# Altium PCB NixieClockv1.1.PcbDoc
Units mm, origin at the board's own origin, x right, y up, seen from the top; angles counter-clockwise.
Board outline 140 x 54 mm, 2 copper layers (Top Layer, Bottom Layer); 61 components, 93 nets, 301 pads, 68 vias.
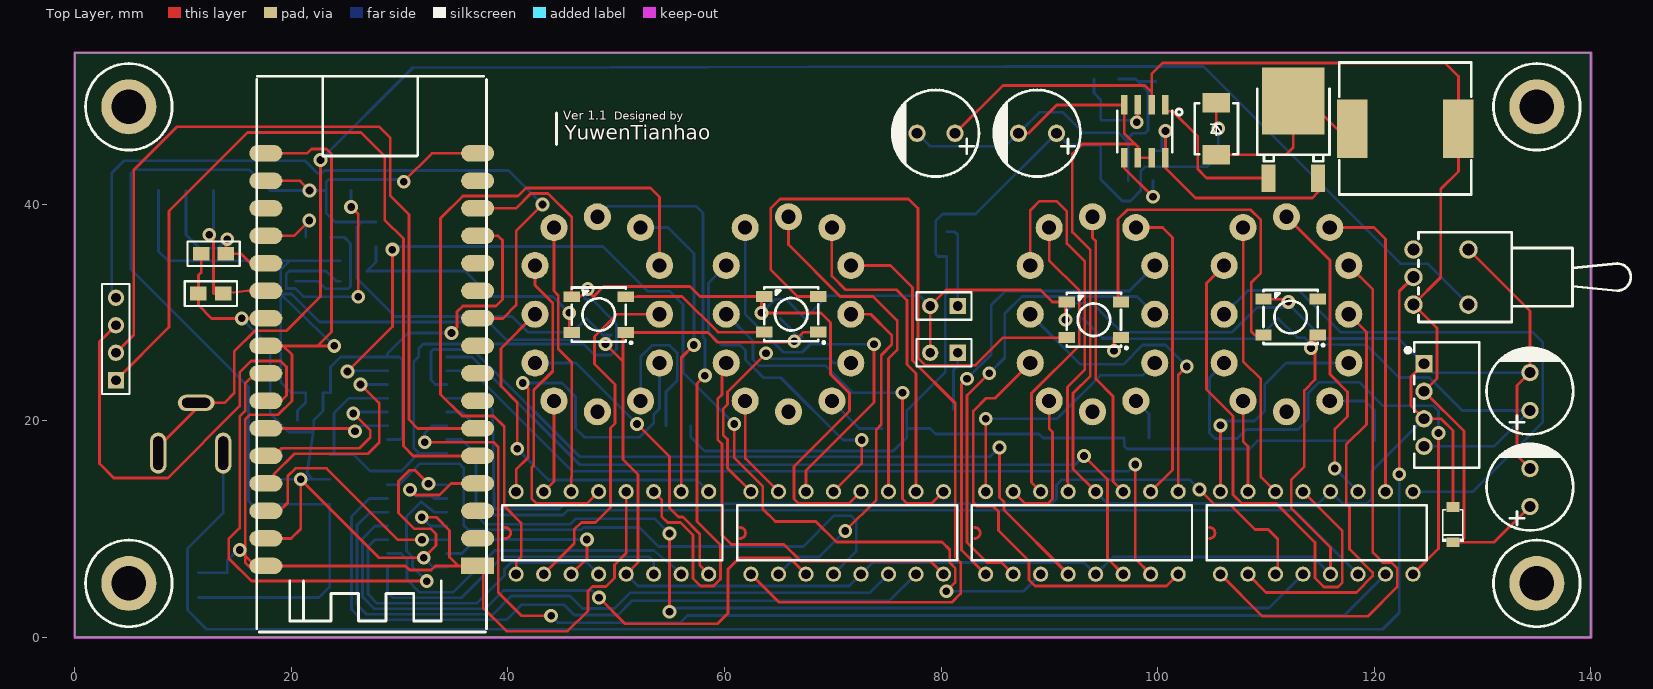
[diagram p0: Top Layer view]
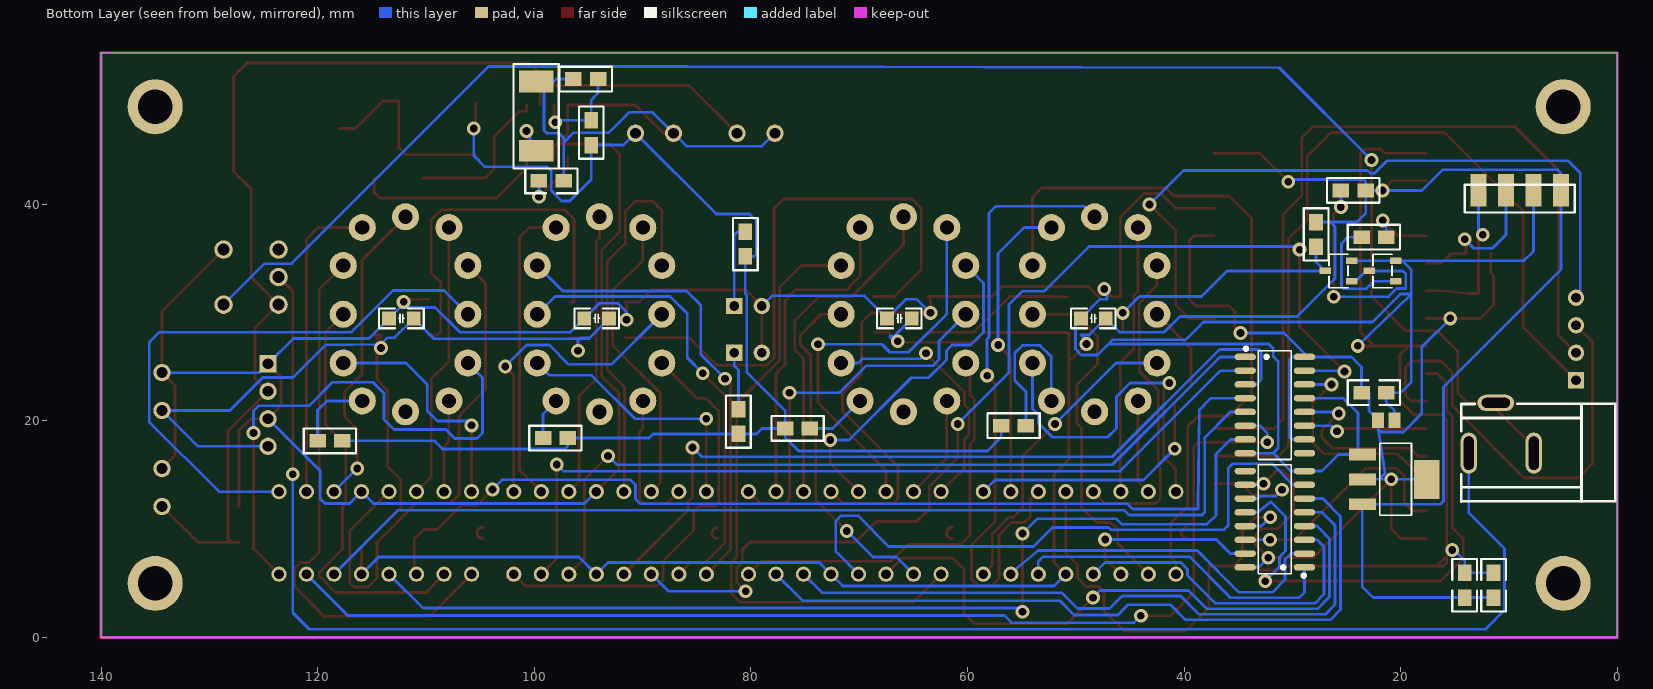
[diagram p1: Bottom Layer view, seen from below]
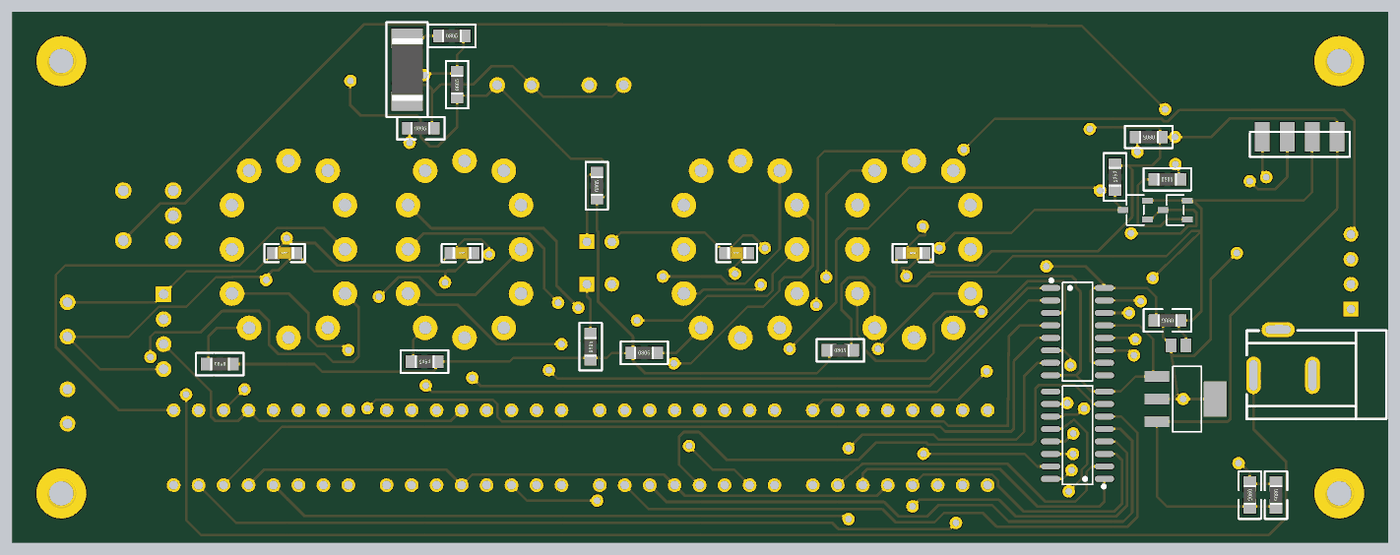
[diagram p2: 3D render of the assembled board from below, using the file's embedded part models]

## Layer stack, top to bottom
Top Solder: solder mask 0.0102, Solder Resist, Dk 3.5
Top Layer: signal copper 0.0356
Dielectric 1: dielectric 0.32, FR-4, Dk 4.8
Bottom Layer: signal copper 0.0356
Bottom Solder: solder mask 0.0102, Solder Resist, Dk 3.5

## Board outline
0,0 0,54 140,54 140,0

## Design rules (kind name [scope] priority, off if disabled: settings)
Clearance [All] p1: gap=0.254 ignorepadtopadclearanceinfootprint=FALSE except(0: Arc-Hole Track-Hole SMDPad-Hole THPad-Hole Via-Hole Fill-Hole Poly-Hole Region-Hole Text-Hole)
PolygonConnect [All] p1: connectstyle=Relief reliefconductorwidth=0.254 reliefentries=4 polygonreliefangle="90 Angle" airgapwidth=0.254
RoutingVias [All] p1: holewidth=0.711 width=1.27 viastyle="Through Hole" minholewidth=0.711 minwidth=1.27 maxholewidth=0.711 maxwidth=1.27
SolderMaskExpansion [All] p1: expansion=0.102 istentingtop=FALSE
Width [All] p1: maxlimit=0.254 minlimit=0.127 preferedwidth=0.254 minimp=50.000000 maximp=50.000000 favimp=50.000000
30 further rules are at their usual default settings.

## Classes and differential pairs
component class NixieClock: *4 *5 *6 *7 *8 C9 C11 C12 C13 LED1 LED2 LED3 LED4 SW1

## Components (designator, comment, footprint, x,y, rotation, side; value= is the part's Value field where it differs from the comment)
*1 "" K155ID1 49.657,9.652 r0 top
*2 "" K155ID1 71.332,9.652 r0 top
*3 "" K155ID1 93.006,9.652 r0 top
*4 "" K155ID1 114.681,9.652 r0 top
*5 "" IN12 48.26,29.845 r0 top
*6 "" IN12 65.913,29.845 r0 top
*7 "" IN12 93.98,29.845 r0 top
*8 "" IN12 111.887,29.845 r0 top
C1 "" C0805 21.336,20.066 r0 bottom
C2 "" 0805C 21.336,22.606 r0 bottom
C3 "" 0805C 14.097,5.969 r270 bottom
C4 "" 0805C 11.43,5.969 r270 bottom
C5 "" CAP-TH_BD8.0-P3.50-D0.5-FD 134.366,13.843 r90 top
C6 "" CAP-TH_BD8.0-P3.50-D0.5-FD 134.366,22.705 r90 top
C7 "" CAP-TH_BD8.0-P3.50-D0.5-FD 79.536,46.555 r180 top
C8 "" 0805C 99.568,42.164 r180 bottom
C9 "" "C 0805_M" 48.387,29.464 r180 bottom value=104
C10 "" CAP-TH_BD8.0-P3.50-D0.5-FD 88.906,46.555 r180 top
C11 "" "C 0805_M" 66.294,29.464 r180 bottom value=104
C12 "" "C 0805_M" 94.234,29.464 r180 bottom value=104
C13 "" "C 0805_M" 112.268,29.464 r180 bottom value=104
D1 "" SOD-123_L2.7-W1.6-LS3.7-RD 127.254,10.43 r90 top
D2 "" SMB_L4.6-W3.6-LS5.3-R-RD 105.41,46.977 r270 top
DC1 "" DC-IN-TH_DC-005-20A 10.715,19.343 r0 bottom
L1 "" IND-SMD_L12.0-W12.0 122.862,46.99 r0 top
LED1 "" LED-SMD_4P-L5.0-W5.0-BL_TC5050RGB 48.387,29.814 r180 top
LED2 "" LED-SMD_4P-L5.0-W5.0-BL_TC5050RGB 66.167,29.845 r180 top
LED3 "" LED-SMD_4P-L5.0-W5.0-BL_TC5050RGB 94.107,29.337 r180 top
LED4 "" LED-SMD_4P-L5.0-W5.0-BL_TC5050RGB 112.268,29.591 r180 top
P1 "" HDR1X2 81.534,26.289 r180 top
P2 "" HDR1X2 81.534,30.607 r180 top
P4 "" HDR1X4#1 3.81,23.749 r90 top
Q1 "" TO-252-2_L6.5-W6.1-P4.56-LS9.9-BR-CW 112.522,45.974 r270 top
Q2 "" SOT-23-3_L2.9-W1.6-P1.90-LS2.8-BR 25.746,33.843 r180 bottom
Q3 "" SOT-23-3_L2.9-W1.6-P1.90-LS2.8-BR 21.682,33.843 r180 bottom
R1 "" 2512R 99.822,48.133 r90 bottom
R2 "" 0805R 96.393,51.562 r180 bottom
R3 "" 0805R 94.742,45.466 r90 bottom
R4 "" 0805R 27.813,38.354 r270 bottom
R5 "" 0805R 23.241,41.275 r0 bottom
R6 "" 0805R 23.622,36.957 r180 bottom
R7 "" 0805R 11.43,31.75 r0 top
R8 "" 0805R 11.684,35.433 r0 top
R9 "" 0805R 56.896,19.558 r180 bottom
R10 "" 0805R 76.835,19.304 r180 bottom
R11 "" 0805R 96.901,18.415 r0 bottom
R12 "" 0805R 117.729,18.161 r0 bottom
R13 "" 0805R 81.153,18.796 r90 bottom
R14 "" 0805R 80.518,35.179 r90 bottom
SW1 "" SW-TH_ST-0-102-C03-N003-RS 126.148,33.274 r90 top
U1 "" SOT-223-3_L6.5-W3.4-P2.30-LS7.0-BR 20.574,14.605 r0 bottom
U2 "" PWRM-TH_BXXXXS-1W 124.587,21.463 r270 top
U3 "" SOIC-16_L9.9-W3.9-P1.27-LS6.0-BL 31.623,10.922 r90 bottom
U4 "" SOIC-16_L9.9-W3.9-P1.27-LS6.0-BL 31.623,21.463 r270 bottom
U5 "" SO-8_L4.9-W3.9-P1.27-LS6.0-BL 98.806,46.736 r180 top
U6 "" LUATOS-ESP32C3 27.305,51.816 r180 top
U7 "" HDR1X4#2 5.207,40.525 r0 bottom
? "" M3x4_L 135,5 r0 top
? "" M3x4_L 5,5 r0 top
? "" M3x4_L 135,49 r0 top
? "" M3x4_L 5,49 r0 top

## Footprints (in the part's own frame and the unit in brackets; to place one, negate y for a bottom-side part, rotate by r counter-clockwise, add the part's x,y. Pads: shape width x height; smd on the part's side, far side on the other; paste and mask are expansions set on the pad)
0805C [mil] "2.0mmx1.2mm（蒜米工坊）"
  rect 60x50 smd: 1(0,0) 2(90,0)
  silkscreen extent -50,-45 140,45, body extent 5,-25 83,25, height 22
0805R [mil]
  rect 60x50 smd: 1(0,0) 2(90,0)
  silkscreen extent -50,-45 140,45, body extent 5,-25 83,25, height 22
2512R [mm]
  rect 2x3.2 smd: 1(-3.2,0) 2(3.2,0)
  silkscreen extent -4.83,-2.08 4.83,2.11, body extent -3.2,-1.63 3.2,1.57, height 0.7
C0805 [mm] "Chip Capacitor, Body 2.0x1.3mm, IPC High Density"
  rect 1.1x1.4 smd: 1(-0.75,0) 2(0.75,0)
  body extent -1.1,-0.72 1.1,0.72, height 1.4
"C 0805_M" [mil] "无极性贴片电容"
  rect 50x50 smd: 1(-45,0) 2(45,0)
  silkscreen extent -81,-36 81,36, body extent -39,-24 39,24, height 20
CAP-TH_BD8.0-P3.50-D0.5-FD [mm]
  round 1.6 hole 1 paste+0 mask+0.051: 1(-1.75,0) 2(1.75,0)
  silkscreen extent -3.96,-4 4.04,4
DC-IN-TH_DC-005-20A [mm]
  oval 1.5x3.8 hole 0.9 slot 3.1 at 90 deg paste+0 mask+0.051: 1(3.001,2.325) 2(-3,2.325)
  oval 3.4x1.5 hole 0.9 slot 2.6 at 0 deg paste+0 mask+0.051: 3(0.5,-2.324)
  silkscreen extent -10.51,-2.24 3.71,6.78
HDR1X2 [mm] "Connector; Header; 2 Position"
  rect 1.5x1.5 hole 0.9: 1(0,0)
  round 1.5 hole 0.9: 2(2.54,0)
  silkscreen extent -1.27,-1.27 3.81,1.27
HDR1X4#1 [mm] "Connector; Header; 4 Position"
  rect 1.5x1.5 hole 0.9: 1(0,0)
  round 1.5 hole 0.9: 2(2.54,0) 3(5.08,0) 4(7.62,0)
  silkscreen extent -1.27,-1.27 8.89,1.27
HDR1X4#2 [mm] "Connector; Header; 4 Position"
  rect 1.5x3 smd: 1(7.62,-0.75) 2(5.08,-0.75) 3(2.54,-0.75) 4(0,-0.75)
  silkscreen extent -1.27,-1.27 8.89,1.27
IN12 [mm]
  round 2.5 hole 1.3 paste+0 mask+0.051: 1(4,-8) 2(5.75,-4.5) 3(5.75,0) 4(5.75,4.5) 5(4,8) 6(0,9) 7(-4,8) 8(-5.75,4.5) 9(-5.75,0) 10(-5.75,-4.5) 11(-4,-8) 12(0,-9)
IND-SMD_L12.0-W12.0 [mm]
  rect 2.8x5.4 smd paste+0 mask+0.051: 1(4.9,0) 2(-4.9,0)
  silkscreen extent -6.1,-6.1 6.1,6.1
K155ID1 [mil]
  round 55 hole 35.83 paste+0 mask+2: 1(-350,-150) 2(-250,-150) 3(-150,-150) 4(-50,-150) 5(50,-150) 6(150,-150) 7(250,-150) 8(350,-150) 9(350,150) 10(250,150) 11(150,150) 12(50,150) 13(-50,150) 14(-150,150) 15(-250,150) 16(-350,150)
  Top Layer lines w10: -390,-20 ccw(c-390,0) -390,20
  silkscreen extent -400,-100 400,100
LED-SMD_4P-L5.0-W5.0-BL_TC5050RGB [mm]
  rect 1.5x1 smd paste+0 mask+0.051: 1(-2.5,1.65) 2(-2.5,-1.65) 3(2.5,-1.65) 4(2.5,1.65)
  silkscreen extent -3.1,-2.5 2.5,2.7
LUATOS-ESP32C3 [mil]
  rect 120x60 smd paste+0 mask+4: 1(-390,1780)
  oval 120x60 smd paste+0 mask+4: 2(-390,1680) 3(-390,1580) 4(-390,1480) 5(-390,1380) 6(-390,1280) 7(-390,1180) 8(-390,1080) 9(-390,980) 10(-390,880) 11(-390,780) 12(-390,680) 13(-390,580) 14(-390,480) 15(-390,380) 16(-390,280) 17(380,1780) 18(380,1680) 19(380,1580) 20(380,1480) 21(380,1380) 22(380,1280) 23(380,1180) 24(380,1080) 25(380,980) 26(380,880) 27(380,780) 28(380,680) 29(380,580) 30(380,480) 31(380,380) 32(380,280)
  silkscreen extent -422,0 413,2020
M3x4_L [mm] "M3铜柱，长：4mm"
  round 5.08 hole 3.175: 1(0,0)
  silkscreen extent -4,-4 4,4, body extent -2.7,-2.35 2.7,2.35, height 4.05
PWRM-TH_BXXXXS-1W [mm]
  rect 1.6x1.6 hole 1 paste+0 mask+0.051: 1(-3.81,0)
  round 1.6 hole 1 paste+0 mask+0.051: 2(-1.27,0) 3(1.27,0) 4(3.81,0)
  silkscreen extent -5.8,-1.68 5.8,5.1
SMB_L4.6-W3.6-LS5.3-R-RD [mm]
  rect 1.8x2.54 smd paste+0 mask+0.051: 1(2.4,0) 2(-2.4,0)
  silkscreen extent -2.35,-2 2.35,2
SO-8_L4.9-W3.9-P1.27-LS6.0-BL [mm]
  rect 0.6x1.8 smd paste+0 mask+0.05: 1(-1.905,-2.45) 2(-0.635,-2.45) 3(0.635,-2.45) 4(1.905,-2.45) 5(1.905,2.45) 6(0.635,2.45) 7(-0.635,2.45) 8(-1.905,2.45)
  silkscreen extent -3.46,-2.06 2.54,1.91
SOD-123_L2.7-W1.6-LS3.7-RD [mm]
  rect 0.91x1.22 smd paste+0 mask+0.051: 1(-1.635,0) 2(1.635,0)
  silkscreen extent -1.6,-1 1.38,1
SOIC-16_L9.9-W3.9-P1.27-LS6.0-BL [mm]
  oval 0.602x1.971 smd: 1(-4.445,-2.735) 2(-3.175,-2.735) 3(-1.905,-2.735) 4(-0.635,-2.735) 5(0.635,-2.735) 6(1.905,-2.735) 7(3.175,-2.735) 8(4.445,-2.735) 9(4.445,2.736) 10(3.175,2.736) 11(1.905,2.736) 12(0.635,2.736) 13(-0.635,2.736) 14(-1.905,2.736) 15(-3.175,2.736) 16(-4.445,2.736)
  silkscreen extent -5.36,-2.82 5.03,1.52
SOT-23-3_L2.9-W1.6-P1.90-LS2.8-BR [mm]
  rect 1.07x0.6 smd paste+0 mask+0.051: 1(1.235,-0.95) 2(1.235,0.95) 3(-1.235,0)
  silkscreen extent -0.88,-1.54 0.88,1.54
SOT-223-3_L6.5-W3.4-P2.30-LS7.0-BR [mm]
  rect 2.5x1.1 smd paste+0 mask+0.051: 1(2.97,-2.3) 2(2.97,0) 3(2.97,2.3)
  rect 2.34x3.6 smd paste+0 mask+0.051: 4(-2.97,0)
  silkscreen extent -1.57,-3.33 1.37,3.33
SW-TH_ST-0-102-C03-N003-RS [mm]
  round 1.7 hole 1.1 paste+0 mask+0.051: 1(-2.54,2.54) 2(0,2.54) 3(2.54,2.54) 4(2.54,-2.54) 5(-2.54,-2.54)
  silkscreen extent -4.15,-17.53 4.15,2.06
TO-252-2_L6.5-W6.1-P4.56-LS9.9-BR-CW [mm]
  rect 2.54x1.3 smd paste+0 mask+0.051: 1(3.556,-2.28) 3(3.556,2.28)
  rect 6.2x5.8 smd paste+0 mask+0.051: 2(-3.556,0)
  silkscreen extent -4.7,-3.33 2,3.34

## Part data
*1 *2 *3 *4: library part K155ID1
*5 *6 *7 *8: library part IN-12
C1 C2 C3 C4: library part C, "Capacitor"
C5 C6 C10: library part 10uF, BOM_JLCPCB Part Class="Extended Part", BOM_Manufacturer=UNITED(怡德), BOM_Manufacturer Part=LW100M2500814PE4, BOM_Supplier=LCSC, BOM_Supplier Part=C2847238, Contributor=LCSC, nameAlias=Capacitance, spicePre=C, spiceSymbolName=LW100M2500814PE4
C7: library part 100uF, BOM_JLCPCB Part Class="Extended Part", BOM_Manufacturer=UNITED(怡德), BOM_Manufacturer Part=LW100M2500814PE4, BOM_Supplier=LCSC, BOM_Supplier Part=C2847238, Contributor=LCSC, nameAlias=Capacitance, spicePre=C, spiceSymbolName=LW100M2500814PE4
C8: library part 0.1u, Contributor=LCEDA_Lib, nameAlias=Value(F), spicePre=C, spiceSymbolName=C_0603_US
C9 C11 C12 C13: library part Cap, "Capacitor", LatestRevisionDate=17-Jul-2002, LatestRevisionNote="Re-released for DXP Platform.", PackageDescription="Radial Cap, Thru-Hole; 2 Leads; 0.3 in Pin Spacing", PackageReference=RAD-0.3, Published=8-Jun-2000, Publisher="Altium Limited"
D1: library part LMSZ5242BT1G, BOM_JLCPCB Part Class="Extended Part", BOM_Manufacturer=LRC(乐山无线电), BOM_Manufacturer Part=LMSZ5242BT1G, BOM_Supplier=LCSC, BOM_Supplier Part=C124150, Contributor=LCSC, spicePre=D, spiceSymbolName=LMSZ5242BT1G
D2: library part SS2200, BOM_JLCPCB Part Class="Extended Part", BOM_Manufacturer=MDD, BOM_Manufacturer Part=SS2200, BOM_Supplier=LCSC, BOM_Supplier Part=C64997, spicePre=D, spiceSymbolName=SS2200
DC1: library part DC-005-20A_C136744, BOM_JLCPCB Part Class="Extended Part", BOM_Manufacturer=韩国韩荣, BOM_Manufacturer Part=DC-005-20A, BOM_Supplier=LCSC, BOM_Supplier Part=C136744, Contributor=LCSC, spicePre=D, spiceSymbolName=DC-005-20A_C136744
L1: library part 220uH, BOM_JLCPCB Part Class="Extended Part", BOM_Manufacturer="Sunltech Tech", BOM_Manufacturer Part=SLH1207S221MTT, BOM_Supplier=LCSC, BOM_Supplier Part=C182174, Contributor=LCSC, nameAlias=Inductance, spicePre=L, spiceSymbolName=SLH1207S221MTT
LED1 LED2 LED3 LED4: library part WS2812B-B, Emitted Color=RGB三色, JLCPCB Part Class="Extended Part", LCSC Part Name="RGB三色 （注意防潮，请查阅规格书中对应具体内容）", Manufacturer=worldsemi, Add into BOM=yes, Convert to PCB=yes, Datasheet=https://atta.szlcsc.com/upload/public/pdf/source/20200615/C114586_26EB6813EC9F2A3F6C7FBB2AD75DE01F.pdf, Device=WS2812B-B, Manufacturer Part=WS2812B-B, Name=WS2812B-B, Supplier=LCSC, Supplier Footprint=SMD5050, Supplier Part=C114586, Symbol=WS2812B-B
P1 P2: library part "Header 2", "Header, 2-Pin", LatestRevisionDate=17-Jul-2002, LatestRevisionNote="Re-released for DXP Platform.", Publisher="Altium Limited"
P4: library part "Header 4", "Header, 4-Pin", LatestRevisionDate=17-Jul-2002, LatestRevisionNote="Re-released for DXP Platform.", Publisher="Altium Limited"
Q1: library part IRFR420BT, BOM_JLCPCB Part Class="Extended Part", BOM_Manufacturer="VBsemi Elec", BOM_Manufacturer Part=IRFR420BT, BOM_Supplier=LCSC, BOM_Supplier Part=C878947, Contributor=LCSC, spicePre=Q, spiceSymbolName=IRFR420BT
Q2 Q3: library part "S9013 120-200", BOM_JLCPCB Part Class="Extended Part", BOM_Manufacturer=CJ(江苏长电/长晶), BOM_Manufacturer Part=S9013, BOM_Supplier=LCSC, BOM_Supplier Part=C107404, spicePre=Q, spiceSymbolName="S9013 120-200"
R1: library part 10m, Contributor=LCEDA_Lib, nameAlias=Value(Ω), spicePre=R, spiceSymbolName=R_0805_EU
R2 R4 R5 R6 R7 R8 R9 R10 R11 R12 R13 R14: library part 1.6k, Contributor=LCEDA_Lib, nameAlias=Value(Ω), spicePre=R, spiceSymbolName=R_0805_EU
R3: library part 1.8M, Contributor=LCEDA_Lib, nameAlias=Value(Ω), spicePre=R, spiceSymbolName=R_0805_EU
SW1: library part ST-0-102-C03-N003-RS, BOM_JLCPCB Part Class="Extended Part", BOM_Manufacturer="YUEN FUNG(源丰)", BOM_Manufacturer Part=ST-0-102-C03-N003-RS, BOM_Supplier=LCSC, BOM_Supplier Part=C1788489, Contributor=LCSC, spicePre=S, spiceSymbolName=ST-0-102-C03-N003-RS
U1: library part AMS1117-3.3, BOM_JLCPCB Part Class="Basic Part", BOM_Manufacturer=AMS, BOM_Manufacturer Part=AMS1117-3.3, BOM_Supplier=LCSC, BOM_Supplier Part=C6186, sourceId=dwIGgezVh, spicePre=U, spiceSymbolName=AMS1117-3.3, timeStamp=1476261164
U2: library part B1205S-1W_C512041, BOM_JLCPCB Part Class="Extended Part", BOM_Manufacturer=rlt, BOM_Manufacturer Part=B1205S-1W, BOM_Supplier=LCSC, BOM_Supplier Part=C512041, Contributor=LCSC, spicePre=U, spiceSymbolName=B1205S-1W_C512041
U3 U4: library part 74HC595D,118, BOM_JLCPCB Part Class="Basic Part", BOM_Manufacturer=Nexperia(安世), BOM_Manufacturer Part=74HC595D,118, BOM_Supplier=LCSC, BOM_Supplier Part=C5947, spicePre=X, spiceSymbolName=74HC595D,118
U5: library part MAX1771ESA+T, BOM_JLCPCB Part Class="Extended Part", BOM_Manufacturer="Maxim Integrated", BOM_Manufacturer Part=MAX1771ESA+T, BOM_Supplier=LCSC, BOM_Supplier Part=C407903, Contributor=LCSC, spicePre=U, spiceSymbolName=MAX1771ESA+T
U6: library part "Luatos ESP32C3", BOM_Supplier=LUATOS, Contributor=KagurazakaTsuki, link=https://wiki.luatos.com/chips/esp32c3/board.html, spicePre=U, spiceSymbolName="Luatos ESP32C3"
U7: library part SHT-30

## Via types
v1: diameter 1.27, hole 0.711, Top Layer to Bottom Layer, 68 vias

## Nets (pads, with @x,y where several pads share a name; then routed paths per layer and width w, separated by ;. In a path a pad name is that pad's centre, name@x,y a point inside that pad or via, vN(x,y) a via of type N, cw(c..) or ccw(c..) an arc to the next point about the centre after c; other vN are vias at no path point)
170V: C10.1 D2.2 R3.1 R9.1 R10.1 R11.1 R12.1 R13.1 R14.1 | length 128.5
  Top Layer w0.254: D2.2 105.41,47.168 v1(105.588,46.99)
  Bottom Layer w0.254: R9.1 56.896,18.491 58.172,17.215 75.584,17.215 76.835,18.466 R10.1 ; v1(105.588,46.99) 105.588,44.501 104.546,43.459 98.831,43.459 98.425,43.053 98.425,41.25 97.485,40.31 96.723,40.31 94.742,42.291 R3.1 91.745,45.466 C10.1 83.192,39.091 80.137,39.091 79.502,38.456 79.502,35.408 79.731,35.179 R14.1 80.518,31.775 80.391,31.648 80.391,24.511 76.835,20.955 R10.1 ; R12.1 109.22,18.161 108.458,17.399 97.18,17.399 96.901,17.678 R11.1 89.408,18.415 89.027,18.796 R13.1 79.502,18.796 78.994,19.304 R10.1
+3.3: C1.2 C2.2 R7.1 R8.1 U1.2 U1.4 U3.10 U3.16 U4.10 U4.16 U6.13 U6.18 U6.26 | length 121.8
  Top Layer w0.254: R8.1 11.684,33.706 11.43,33.452 R7.1 11.43,30.683 12.649,29.464 v1(15.418,29.464) U6.26 ; U6.18 19.99,9.144 20.879,10.033 v1(20.879,14.605) 28.118,7.366 v1(32.233,7.366) 33.376,8.509 33.376,9.55 32.893,10.033 31.369,10.033 29.896,11.506 29.896,14.427 30.912,15.443 31.42,15.443 v1(32.664,14.199) ; v1(34.798,28.118) 35.306,28.626 35.306,30.074 35.839,30.607 38.887,30.607 39.497,31.217 39.497,36.678 39.091,37.084 U6.13
  Bottom Layer w0.254: v1(15.418,29.464) 18.059,26.822 18.059,20.676 19.761,18.974 21.819,18.974 22.086,19.241 ; U1.4 v1(20.879,14.605) 22.022,14.605 ; U1.2 22.022,14.605 ; U4.10 30.074,18.288 30.277,18.491 30.277,25.603 29.972,25.908 U4.16 ; v1(32.233,7.366) 33.122,6.477 U3.16 ; v1(32.664,14.199) 32.766,14.097 U3.10 ; v1(34.798,28.118) 30.785,28.118 28.888,26.221 U4.16 ; 22.022,14.605 21.463,15.164 22.086,19.241 ; 22.086,19.241 C1.2 22.936,20.916 22.936,22.606 C2.2 23.622,24.994 24.536,25.908 U4.16
+5: *1.5 *2.5 *3.5 *4.5 C3.2 C4.2 C6.1 C9.2 C11.2 C12.2 C13.2 LED1.1 LED2.1 LED3.1 LED4.1 R4.1 R5.1 U1.3 U2.4 U6.16 U6.31 U7.4 | length 346.8
  Top Layer w0.254: U6.31 20.803,42.164 v1(21.692,41.275) ; v1(30.378,42.088) 32.995,44.704 U6.16 ; v1(49.022,27.102) 50.622,25.502 ; *1.5 52.006,6.921 52.006,15.05 50.622,16.434 50.622,25.502 ; LED2.1 67.286,28.195 v1(66.446,27.356) 66.524,27.356 66.625,27.254 59.377,27.254 58.468,28.164 LED1.1 50.622,28.164 50.622,25.502 ; v1(95.961,26.467) 95.961,27.687 LED3.1 ; v1(114.148,26.721) 114.148,27.941 LED4.1@114.529,27.941 ; LED4.1 LED4.1@114.529,27.941 ; *4.5 115.951,8.306 112.319,11.938 112.319,14.554 113.538,15.773 113.538,22.813 114.529,23.804 LED4.1@114.529,27.941
  Bottom Layer w0.254: C4.2 C3.2 22.553,3.683 23.544,4.674 U1.3 16.332,12.305 16.053,12.584 16.053,23.139 5.207,33.985 U7.4 5.207,42.875 5.512,43.18 16.129,43.18 18.034,41.275 v1(21.692,41.275) R5.1 ; R4.1 26.492,38.354 ; v1(30.378,42.088) 30.175,42.291 23.444,42.291 23.241,42.088 R5.1 ; v1(49.022,27.102) 49.022,27.432 49.53,27.94 48.768,27.94 C9.2 45.974,28.194 41.834,28.194 40.386,29.642 29.566,29.642 26.06,33.147 26.06,37.922 26.492,38.354 ; *1.5 52.019,4.75 71.509,4.75 *2.5 73.694,6.934 93.184,6.934 *3.5 95.864,7.429 114.364,7.429 *4.5 ; C11.2 66.802,27.813 67.183,27.813 66.726,27.356 v1(66.446,27.356) ; C12.2 94.869,27.686 ; v1(95.961,26.467) 95.961,27.432 95.809,27.584 ; v1(114.148,26.721) v1@114.148,27.076 ; U2.4 131.064,17.653 C6.1 128.118,20.955 125.07,24.003 122.276,24.003 119.278,27 114.153,27.076 v1@114.148,27.076 ; R5.1 23.241,39.167 24.054,38.354 26.492,38.354 ; 94.869,27.686 94.971,27.584 95.809,27.584 ; 94.869,27.686 95.377,27.686 95.707,27.686 95.809,27.584 ; 95.809,27.584 109.245,27.584 C13.2 112.903,27.686 113.538,27.686 v1@114.148,27.076
+12: C5.1 C7.1 D1.1 L1.1 SW1.1 U2.2 U5.2 | length 108.6
  Top Layer w0.254: C7.1 85.709,50.978 98.831,50.978 99.441,50.368 ; U5.2 99.441,50.368 ; D1.1 127.921,8.795 ; C5.1 131.068,8.795 127.921,8.795 ; 99.441,50.368 99.441,52.019 100.457,53.035 126.543,53.035 127.762,51.816 L1.1 127.762,43.028 126.136,41.402 126.136,33.263 SW1.1 125.781,28.561 125.781,23.927 U2.2 128.27,19.05 128.27,9.144 127.921,8.795
DIN: LED1.4 Q2.3 R4.2 | length 24.9
  Top Layer w0.254: v1(45.669,29.972) 45.669,28.164 LED1.4
  Bottom Layer w0.254: R4.2 27.813,34.675 Q2.3 36.032,33.843 38.379,31.496 44.145,31.496 v1(45.669,29.972)
First_0: *1.16 *5.2 | length 32.9
  Top Layer w0.254: *1.16 40.767,15.494 41.885,16.612 41.885,22.987 v1(41.377,23.495)
  Bottom Layer w0.254: v1(41.377,23.495) 44.983,23.495 46.253,22.225 46.253,19.304 47.066,18.491 52.146,18.491 53.467,19.812 53.467,20.574 54.01,21.117 *5.2
First_1: *1.15 *5.11 | length 8.8
  Top Layer w0.254: *1.15 44.26,14.415 *5.11
First_2: *1.8 *5.10 | length 28.6
  Top Layer w0.254: v1(51.918,19.71) 54.915,16.713 54.915,11.963 55.753,11.125 56.159,11.125 57.708,9.577 57.708,6.681 *1.8
  Bottom Layer w0.254: *5.10 46.283,25.345 v1(51.918,19.71)
First_3: *1.9 *5.9 | length 33.7
  Top Layer w0.254: v1(40.869,17.424) 40.869,21.692 39.355,23.206 39.355,26.69 *5.9
  Bottom Layer w0.254: v1(40.869,17.424) 43.752,14.541 57.468,14.541 *1.9
First_4: *1.13 *5.8 | length 29.8
  Top Layer w0.254: *5.8 42.51,32.522 44.141,30.891 44.141,24.583 42.393,22.835 42.393,15.9 42.215,15.723 42.215,12.802 42.647,12.37 47.295,12.37 *1.13
First_5: *1.14 *5.7 | length 25.1
  Top Layer w0.254: *5.7 44.26,31.984 44.649,31.595 44.649,26.623 45.898,25.375 45.898,14.859 45.847,14.808 *1.14
First_6: *1.11 *5.6 | length 58.8
  Top Layer w0.254: *1.11 54.204,12.725 54.204,11.176 54.762,10.617 55.931,10.617 57.087,9.461 57.087,5.448 57.785,4.75 59.004,4.75 59.639,5.385 59.639,8.534 57.455,10.719 57.455,23.444 v1(58.191,24.181)
  Bottom Layer w0.254: *5.6 49.242,39.827 57.379,39.827 58.024,39.182 58.024,27.706 58.191,27.538 v1(58.191,24.181)
First_7: *1.10 *5.5 | length 28.4
  Top Layer w0.254: *1.10 56.007,25.832 v1(57.175,27)
  Bottom Layer w0.254: *5.5 54.789,37.845 57.175,35.458 v1(57.175,27)
First_8: *1.1 *5.4 | length 65.9
  Top Layer w0.254: *1.1 40.767,6.96 41.224,7.417 41.224,10.566 39.675,12.116 39.675,19.456 38.684,20.447 35.789,20.447 33.782,22.454 33.782,38.71 35.839,40.767 40.933,40.767 41.674,41.508 53.158,41.508 54.01,40.656 *5.4
First_9: *1.2 *5.3 | length 33.1
  Top Layer w0.254: *1.2 46.122,8.657 46.122,9.957 46.789,10.624 48.089,10.624 49.466,12.002 49.466,19.342 49.891,19.767 49.891,23.368 48.006,25.253 48.006,27.788 50.063,29.845 *5.3
First_A: *1.3 U3.15 | length 17.3
  Top Layer w0.254: *1.3 47.295,7.29 v1(47.295,9.042)
  Bottom Layer w0.254: U3.15 35.738,7.747 37.033,9.042 v1(47.295,9.042)
First_B: *1.6 U3.1 | length 30
  Bottom Layer w0.254: U3.1 28.88,6.477 28.88,4.166 29.382,3.664 35.696,3.664 39.497,7.465 53.013,7.465 53.467,7.01 *1.6
First_C: *1.7 U3.2 | length 32.1
  Bottom Layer w0.254: U3.2 30.15,7.747 30.683,7.214 30.683,5.34 31.852,4.172 34.931,4.172 38.786,8.026 53.467,8.026 55.499,6.35 *1.7
First_D: *1.4 U3.3 | length 30.5
  Bottom Layer w0.254: U3.3 27.711,9.017 27.076,8.382 27.076,3.999 27.919,3.156 37.115,3.156 39.688,5.728 39.688,6.299 40.31,6.921 47.307,6.921 *1.4
Fourth_0: *4.16 *8.2 | length 21.8
  Top Layer w0.254: *4.16 v1(105.791,19.583)
  Bottom Layer w0.254: v1(105.791,19.583) 106.197,19.99 108.941,19.99 109.88,20.93 109.88,23.368 111.857,25.345 *8.2
Fourth_1: *4.15 *8.11 | length 8.6
  Top Layer w0.254: *8.11 107.887,18.097 108.331,17.653 *4.15
Fourth_2: *4.8 *8.10 | length 49.1
  Top Layer w0.254: *4.8 125.933,8.204 v1(125.933,18.872)
  Bottom Layer w0.254: *8.10 104.775,23.983 104.775,18.898 105.308,18.364 107.34,18.364 108.179,19.202 112.954,19.202 113.868,20.117 113.868,22.555 114.884,23.571 118.618,23.571 120.802,21.387 125.476,21.387 125.933,20.93 v1(125.933,18.872)
Fourth_3: *4.9 *8.9 | length 54.3
  Bottom Layer w0.254: *8.9 108.321,32.029 113.03,32.029 116.865,28.194 134.595,28.194 135.56,27.229 135.56,19.914 129.108,13.462 *4.9
Fourth_4: *4.13 *8.8 | length 48.5
  Top Layer w0.254: *8.8 104.496,32.704 104.496,22.911 106.959,20.447 106.959,13.183 107.772,12.37 110.947,12.37 114.529,8.788 114.529,5.486 115.341,4.674 116.637,4.674 117.043,5.08 117.043,9.83 *4.13
Fourth_5: *4.14 *8.7 | length 25.6
  Top Layer w0.254: *8.7 107.887,25.488 109.525,23.851 109.525,14.808 *4.14
Fourth_6: *4.11 *8.6 | length 29.1
  Top Layer w0.254: *8.6 115.9,34.832 115.9,24.308 117.526,22.682 117.526,20.422 116.357,19.253 v1(116.357,15.596)
  Bottom Layer w0.254: v1(116.357,15.596) *4.11
Fourth_7: *4.10 *8.5 | length 28.9
  Top Layer w0.254: *8.5 119.964,37.845 121.031,36.778 *4.10
Fourth_8: *4.1 *8.4 | length 51.1
  Top Layer w0.254: *4.1 109.677,1.956 119.393,1.956 122.111,4.674 122.111,6.401 121.59,6.921 120.777,6.921 119.865,7.833 119.865,32.117 *8.4
Fourth_9: *4.2 *8.3 | length 39.5
  Top Layer w0.254: *4.2 110.007,4.166 118.341,4.166 119.848,5.672 119.848,6.012 117.704,8.156 117.704,12.065 117.399,12.37 117.399,17.801 119.268,19.67 119.268,28.214 *8.3
Fourth_A: *4.3 U4.4 | length 93.8
  Top Layer w0.254: v1(103.861,13.665) 105.283,12.243 106.731,12.243 108.991,9.982 110.211,9.982 111.074,9.119 111.074,5.842 *4.3
  Bottom Layer w0.254: U4.4 37.516,22.098 38.608,21.006 38.709,11.863 44.755,11.863 45.237,12.344 90.195,12.344 90.653,12.802 90.653,14.097 91.11,14.554 102.972,14.554 v1(103.861,13.665)
Fourth_B: *4.6 U4.5 | length 94.8
  Bottom Layer w0.254: U4.5 35.738,20.828 38.09,18.476 38.09,11.582 38.37,11.302 45.084,11.302 45.542,11.76 112.573,11.76 *4.6
Fourth_C: *4.7 U4.6 | length 108.5
  Top Layer w0.254: v1(32.334,18.034) 38.684,18.034 39.116,17.602 39.116,4.14 41.25,2.007 v1(43.993,2.007)
  Bottom Layer w0.254: v1(32.334,18.034) 32.334,18.898 32.995,19.558 U4.6 ; v1(43.993,2.007) 44.628,1.372 55.931,1.372 56.591,2.032 117.221,2.032 *4.7
Fourth_D: *4.4 U4.7 | length 95
  Top Layer w0.254: v1(54.915,2.388) v1(54.915,9.601)
  Bottom Layer w0.254: U4.7 35.712,18.288 37.059,16.942 37.059,11.278 37.871,10.465 45.771,10.465 46.279,10.973 53.543,10.973 v1(54.915,9.601) ; v1(54.915,2.388) 55.245,2.718 110.287,2.718 *4.4
GND: *1.12 *2.12 *3.12 *4.12 C1.1 C2.1 C3.1 C4.1 C5.2 C6.2 C7.2 C8.2 C9.1 C10.2 C11.1 C12.1 C13.1 D1.2 LED1.3 LED2.3 LED3.3 LED4.3 P1.2 P2.2 Q2.2 Q3.2 R1.2 R2.1 SW1.4 U1.1 U2.1 U2.3 U3.8 U3.13 U4.8 U4.13 U5.4 U5.6 U5.7 U6.1 U6.14 U6.17 U6.25 U6.32 U7.3 | length 589.1
  Top Layer w0.254: v1(15.24,8.077) 15.748,7.569 ; U6.25 19.253,26.924 ; U6.32 21.463,44.704 21.869,45.11 23.241,45.11 23.724,44.628 23.724,28.219 22.428,26.924 ; v1(23.978,26.924) 22.428,26.924 ; v1(32.055,11.1) 33.401,11.1 34.62,9.881 34.62,7.417 35.433,6.604 ; U6.14 40.737,39.624 42.113,41 43.709,41 45.898,38.811 45.898,32.207 45.872,32.182 45.872,31.464 LED1.3 46.653,31.464 v1@47.371,31.991 ; v1(47.371,32.182) v1@47.371,31.991 ; *1.12 50.927,7.798 49.835,6.706 49.835,5.486 49.047,4.699 47.828,4.699 47.396,4.267 47.396,2.464 45.517,0.584 39.878,0.584 37.719,2.743 37.719,6.604 U6.1 35.433,6.604 ; LED2.3 LED2.3@63.424,31.495 ; *2.12 71.509,12.37 66.853,12.37 66.421,12.802 66.421,15.799 71.552,20.93 71.552,22.555 69.799,24.308 69.799,29.083 68.91,29.972 v1(63.424,29.972) LED2.3@63.424,31.495 ; P1.2 P2.2 80.467,32.08 89.179,32.08 90.272,30.987 LED3.3@91.491,30.987 ; C10.2 88.062,46.555 90.681,49.174 U5.4@96.901,49.174 ; v1(91.491,29.337) LED3.3@91.491,30.987 ; LED3.3 LED3.3@91.491,30.987 ; *3.12 92.177,15.562 92.177,22.555 93.777,24.155 93.777,35.782 92.119,37.439 92.119,44.646 93.04,45.568 97.912,45.568 ; U5.4 U5.4@96.901,49.174 ; U5.7 U5.6 98.171,45.314 ; LED4.3 111.812,31.241 v1(112.065,30.988) ; U2.1 123.393,24.079 123.393,21.387 U2.3 126.162,20.193 127.254,19.101 D1.2 ; SW1.4 134.366,30.136 C6.2 133.172,23.261 133.172,16.787 C5.2 ; 15.748,7.569 15.748,20.117 16.205,20.574 18.796,20.574 20.066,21.844 20.066,26.111 19.253,26.924 ; 15.748,7.569 15.748,6.909 16.053,6.604 U6.17@16.713,6.604 ; 15.748,7.569 U6.17@16.713,6.604 ; U6.17@16.713,6.604 U6.17 30.556,6.604 30.937,6.223 32.918,6.223 33.299,6.604 35.433,6.604 ; 19.253,26.924 22.428,26.924 ; v1@47.371,31.991 47.898,31.464 48.844,32.41 56.819,32.41 57.734,31.495 LED2.3@63.424,31.495 ; U5.4@96.901,49.174 96.901,46.559 97.912,45.568 ; 97.912,45.568 98.171,45.314 ; 97.912,45.568 97.917,45.568 98.171,45.314
  Bottom Layer w0.254: U7.3 7.747,35.657 8.611,34.793 19.882,34.793 ; C4.1 C3.1 14.097,7.112 15.062,8.077 v1(15.24,8.077) ; C1.1 20.586,20.955 21.336,21.705 C2.1 19.99,22.606 19.023,23.573 19.023,31.704 ; U1.1 U1.1@23.952,16.905 ; v1(23.978,26.924) 19.023,31.704 ; Q2.2 Q3.2 19.882,34.793 ; U4.13 25.328,22.098 23.952,20.723 U1.1@23.952,16.905 ; v1(32.055,11.1) 32.868,10.287 U3.13 ; U4.8 31.775,17.018 ; v1(47.371,32.182) 47.117,31.928 47.117,31.242 47.752,31.242 C9.1 50.038,28.956 50.038,26.619 49.505,26.086 48.006,26.086 46.994,27.098 ; v1(63.424,29.972) 64.694,31.242 65.024,31.242 65.659,31.242 C11.1 69.52,31.547 78.054,31.547 P2.2 ; C7.2 78.976,45.364 85.965,45.364 C10.2 89.09,48.489 91.237,48.489 93.116,46.609 96.393,46.609 97.282,45.72 ; v1(91.491,29.337) 91.491,30.048 92.304,30.861 92.837,30.861 93.98,30.861 C12.1 96.647,28.194 106.883,28.194 109.169,30.48 112.395,30.48 C13.1 ; *3.12 95.369,12.37 114.859,12.37 *4.12 117.043,12.37 119.329,12.37 119.761,12.802 119.761,15.367 U2.3 ; R2.1 97.968,51.562 98.197,51.333 ; C8.2 97.282,45.72 ; R1.2 98.197,51.333 ; v1(112.065,30.988) 111.887,30.988 C13.1 ; C6.2 125.405,24.455 U2.1 122.25,27.61 115.265,27.61 C13.1 ; 19.023,31.704 19.023,33.934 19.882,34.793 ; 19.023,31.704 20.036,31.704 22.606,29.134 38.228,29.134 39.878,27.484 46.608,27.484 46.994,27.098 ; U1.1@23.952,16.905 25.73,16.905 27.268,15.367 U3.8 30.162,15.367 31.775,17.018 ; 31.775,17.018 31.318,17.475 31.318,25.502 31.775,25.959 31.775,26.682 32.191,27.098 46.994,27.098 ; 97.282,45.72 97.282,46.126 97.714,46.558 98.831,46.558 99.106,46.833 99.106,50.424 98.197,51.333
GPIO1: P4.1 U6.5 | length 76.2
  Top Layer w0.254: P4.1 8.712,28.651 8.712,39.37 15.978,46.636 26.44,46.636 28.626,44.45 28.626,38.558 30.353,36.831 30.353,17.678 31.267,16.764 U6.5
GPIO2: P4.2 U6.6 | length 76.7
  Top Layer w0.254: P4.2 5.461,27.94 5.461,43.155 9.474,47.168 28.118,47.168 29.134,46.152 29.134,40.793 30.861,39.066 30.861,20.117 31.674,19.304 U6.6
GPIO3: P4.3 U6.23 | length 42.5
  Top Layer w0.254: P4.3 2.286,27.305 2.286,16.053 3.607,14.732 8.611,14.732 15.24,21.361 15.24,24.486 16.281,25.527 19.025,25.527 19.558,24.994 19.558,22.352 19.05,21.844 U6.23
GPIO4: P4.4 U6.10 | length 68
  Top Layer w0.254: U6.10 39.548,29.464 40.767,30.683 40.767,37.541 v1(43.205,39.98)
  Bottom Layer w0.254: P4.4@3.429,31.369 3.429,42.901 4.547,44.018 21.26,44.018 22.403,42.875 22.809,42.875 23.063,43.129 40.056,43.129 v1(43.205,39.98)
I2C_SCL: R7.2 U6.27 U7.1 | length 14.7
  Top Layer w0.254: v1(12.421,37.186) 12.827,36.779 12.827,31.75 R7.2 15.926,32.004 U6.27
  Bottom Layer w0.254: v1(12.421,37.186) 12.827,37.592 U7.1
I2C_SDA: R8.2 U6.28 U7.2 | length 14.2
  Top Layer w0.254: v1(14.097,36.779) 13.97,36.652 R8.2 15.367,35.433 16.256,34.544 U6.28
  Bottom Layer w0.254: U7.2 10.287,37.186 11.532,35.941 13.259,35.941 v1(14.097,36.779)
LED: R6.2 U6.29 | length 6.3
  Top Layer w0.254: U6.29 20.244,37.084 v1(21.666,38.506)
  Bottom Layer w0.254: R6.2 21.336,38.176 v1(21.666,38.506)
Net*5_1: *5.1 R9.2 | length 15.3
  Bottom Layer w0.254: *5.1 52.26,25.921 53.315,26.976 54.94,26.976 55.641,26.275 55.641,23.724 54.61,22.693 R9.2
Net*6_1: *6.1 R10.2 | length 5.7
  Bottom Layer w0.254: *6.1 72.454,19.304 R10.2
Net*7_1: *7.1 R11.2 | length 3.9
  Bottom Layer w0.254: *7.1 99.187,20.638 R11.2
Net*8_1: *8.1 R12.2 | length 7.3
  Bottom Layer w0.254: *8.1 119.151,21.845 120.015,20.981 R12.2
NetC8_1: C8.1 U5.5 | length 6.2
  Top Layer w0.254: U5.5 96.901,43.358 v1(99.568,40.691)
  Bottom Layer w0.254: v1(99.568,40.691) C8.1
NetD2_1: D2.1 L1.2 Q1.2 | length 18.2
  Top Layer w0.254: D2.1 111.836,44.577 112.522,45.263 Q1.2 113.97,49.53 116.51,46.99 L1.2
NetDC1_1: DC1.1 SW1.2 | length 160.6
  Top Layer w0.254: v1(122.301,15.062) 122.301,31.967 SW1.2
  Bottom Layer w0.254: DC1.1 13.716,11.506 10.414,8.204 10.414,2.54 12.192,0.762 120.777,0.762 122.301,2.286 v1(122.301,15.062)
NetDC1_2: DC1.2 DC1.3 SW1.5 | length 155.2
  Top Layer w0.254: DC1.2 7.715,17.577 11.215,21.077 DC1.3 13.844,21.667 14.732,22.555 14.732,26.416 16.637,28.321 19.558,28.321 22.708,31.471 v1(22.708,44.094)
  Bottom Layer w0.254: v1(22.708,44.094) 31.217,52.603 85.928,52.73 104.216,52.73 122.428,34.519 124.903,34.519 SW1.5
NetLED1_2: LED1.2 LED2.4 | length 14.2
  Top Layer w0.254: LED1.2 51.936,31.464 51.968,31.496 56.083,31.496 59.384,28.195 LED2.4
NetLED2_2: LED2.2 LED3.4 | length 54.3
  Top Layer w0.254: LED2.2 66.726,31.495 64.262,33.959 64.262,39.624 65.126,40.488 76.999,40.488 77.863,39.624 77.863,25.794 78.511,25.146 83.178,25.146 85.719,27.687 LED3.4
NetLED3_2: LED3.2 LED4.4 | length 33.8
  Top Layer w0.254: LED3.2 96.342,30.987 96.342,38.633 97.206,39.497 108.585,39.497 109.525,38.557 109.525,33.655 108.636,32.766 108.636,28.245 108.94,27.941 LED4.4
NetP1_1: P1.1 R13.2 | length 5.4
  Bottom Layer w0.254: R13.2 81.153,24.689 81.534,25.07 P1.1
NetP2_1: P2.1 R14.2 | length 7.7
  Bottom Layer w0.254: R14.2 81.255,37.465 81.534,37.186 P2.1
NetQ1_1: Q1.1 U5.1 | length 14.5
  Top Layer w0.254: U5.1 100.711,48.59 101.371,48.59 103.708,46.253 103.708,43.231 104.521,42.418 Q1.1
NetQ1_3: Q1.3 R1.1 U5.8 | length 22.7
  Top Layer w0.254: v1(100.711,46.761) U5.8 100.711,43.358 103.48,40.589 114.275,40.589 114.802,41.117 Q1.3
  Bottom Layer w0.254: R1.1 100.406,44.933 100.406,46.533 100.635,46.761 v1(100.711,46.761)
NetQ2_1: Q2.1 Q3.3 R5.2 | length 23.9
  Top Layer w0.254: v1(25.527,39.751) 26.187,39.091 v1(26.187,31.471)
  Bottom Layer w0.254: Q2.1 24.166,32.893 23.216,33.843 Q3.3 19.795,33.843 19.531,33.579 19.531,32.212 20.391,32.212 21.133,31.471 v1(26.187,31.471) ; v1(25.527,39.751) R5.2
NetQ3_1: Q3.1 R6.1 | length 11.5
  Bottom Layer w0.254: Q3.1 22.479,32.893 23.165,32.207 25.273,32.207 25.476,32.41 25.476,36.373 24.892,36.957 R6.1
NetR2_2: R2.2 R3.2 U5.3 | length 9.1
  Top Layer w0.254: v1(98.069,47.574) 98.171,47.676 U5.3
  Bottom Layer w0.254: R2.2 94.107,50.267 94.742,49.632 R3.2 97.892,47.752 v1(98.069,47.574)
RCK_1: U3.12 U6.24 | length 49.6
  Top Layer w0.254: U6.24 16.669,24.384 15.748,23.463 15.748,20.904 15.24,20.396 15.24,10.109 14.224,9.093 14.224,7.315 16.332,5.207 v1(32.512,5.207)
  Bottom Layer w0.254: v1(32.512,5.207) 31.197,6.522 31.197,7.437 30.632,8.001 30.632,11.176 31.979,12.522 33.223,11.557 U3.12
RCK_2: U4.12 U6.21 | length 16.4
  Top Layer w0.254: U6.21 18.415,16.764 19.126,17.475 26.289,17.475 27.305,18.491 27.305,19.101 v1(25.73,20.676)
  Bottom Layer w0.254: v1(25.73,20.676) 25.883,20.828 U4.12
SCK_1: U3.11 U6.4 | length 10.6
  Top Layer w0.254: v1(30.963,13.64) 31.441,13.161 33.68,13.161 34.743,14.224 U6.4
  Bottom Layer w0.254: v1(30.963,13.64) 31.572,13.03 32.969,13.03 33.172,12.827 U3.11
SCK_2: U4.11 U6.22 | length 11.6
  Top Layer w0.254: U6.22 25.629,19.304 v1(25.883,19.05)
  Bottom Layer w0.254: v1(25.883,19.05) 26.391,19.558 U4.11
Second_0: *2.16 *6.2 | length 23.7
  Top Layer w0.254: *2.16 60.274,15.629 60.274,18.297 59.881,18.69 59.881,21.115 60.274,21.508 60.274,22.682 v1(63.83,26.238)
  Bottom Layer w0.254: v1(63.83,26.238) 64.338,25.73 69.693,25.73 70.079,25.345 *6.2
Second_1: *2.15 *6.11 | length 9.7
  Top Layer w0.254: *6.11 61.913,20.726 61.925,20.726 61.925,16.518 *2.15
Second_2: *2.8 *6.10 | length 38.6
  Top Layer w0.254: *6.10 59.766,25.345 59.766,22.409 59.373,22.016 59.373,18.275 59.766,17.882 59.766,9.449 60.63,8.585 65.507,8.585 67.056,7.036 79.028,7.036 *2.8
Second_3: *2.9 *6.9 | length 34.5
  Top Layer w0.254: v1(76.429,22.606) 76.429,12.802 76.86,12.37 79.129,12.37 *2.9
  Bottom Layer w0.254: *6.9 62.63,27.378 62.63,25.661 63.195,25.095 69.317,25.095 71.806,22.606 v1(76.429,22.606)
Second_4: *2.13 *6.8 | length 31.5
  Top Layer w0.254: *2.13 72.669,16.07 v1(72.669,18.237)
  Bottom Layer w0.254: *6.8 58.532,32.714 58.532,28.194 59.726,27 61.443,27 61.951,26.492 61.951,25.621 63.588,23.984 65.195,23.984 70.942,18.237 v1(72.669,18.237)
Second_5: *2.14 *6.7 | length 37.8
  Top Layer w0.254: *2.14 67.522,15.422 73.802,21.703 v1(73.802,27.076)
  Bottom Layer w0.254: *6.7 61.913,29.879 65.453,26.34 67.183,26.34 67.92,27.076 v1(73.802,27.076)
Second_6: *2.11 *6.6 | length 31.6
  Top Layer w0.254: *6.6 65.913,36.271 70.688,31.496 73.711,31.496 75.946,29.261 75.946,26.55 75.142,25.745 *2.11
Second_7: *2.10 *6.5 | length 30.3
  Top Layer w0.254: *6.5 69.913,33.377 71.185,32.106 75.874,32.106 76.847,31.132 76.847,25.199 77.682,24.364 *2.10
Second_8: *2.1 *6.4 | length 57.4
  Top Layer w0.254: *2.1 65.032,3.251 81.001,3.251 81.809,4.06 81.809,6.942 81.305,7.445 81.305,21.628 77.355,25.578 77.355,32.309 75.319,34.345 *6.4
Second_9: *2.2 *6.3 | length 32.3
  Top Layer w0.254: v1(71.145,9.83) 74.023,12.708 74.023,19.21 74.473,19.66 74.473,26.06 75.438,27.026 75.438,27.915 73.508,29.845 *6.3
  Bottom Layer w0.254: *2.2 66.569,7.429 68.745,7.429 v1(71.145,9.83)
Second_A: *2.3 U3.4 | length 57.1
  Top Layer w0.254: v1(48.412,3.683) 50.825,1.27 59.36,1.27 60.325,2.235 60.325,6.299 61.366,7.341 66.023,7.341 *2.3
  Bottom Layer w0.254: U3.4 27.736,10.287 26.568,9.119 26.568,3.764 27.685,2.648 37.903,2.648 39.599,4.343 47.752,4.343 v1(48.412,3.683)
Second_B: *2.6 U3.5 | length 62.6
  Bottom Layer w0.254: U3.5 27.254,11.557 26.06,10.363 26.06,3.048 26.969,2.14 38.614,2.14 40.31,3.835 45.72,3.835 46.888,2.667 49.835,2.667 51.308,4.14 73.44,4.14 *2.6
Second_C: *2.7 U3.6 | length 67.7
  Bottom Layer w0.254: U3.6 27.203,12.827 25.552,11.176 25.552,2.571 26.492,1.632 39.859,1.632 41.25,3.023 45.187,3.023 46.126,2.083 50.165,2.083 51.486,3.404 75.243,3.404 *2.7
Second_D: *2.4 U3.7 | length 57.7
  Bottom Layer w0.254: U3.7 29.947,14.097 31.902,16.053 35.509,16.053 35.916,15.646 35.916,10.363 36.322,9.957 46.787,9.957 46.99,10.16 52.146,10.16 53.899,8.407 67.285,8.407 70.129,11.252 71.679,11.252 72.161,10.77 72.161,7.942 *2.4
SI_1: U3.14 U6.19 | length 22.5
  Top Layer w0.254: U6.19 18.923,11.684 19.68,12.441 19.68,14.905 20.396,15.621 23.266,15.621 29.87,9.017 v1(32.08,9.017)
  Bottom Layer w0.254: v1(32.08,9.017) U3.14
SI_2: U4.14 U6.20 | length 21.1
  Top Layer w0.254: U6.20 18.415,14.224 18.415,15.088 20.295,16.967 27.102,16.967 28.118,17.983 28.118,21.641 v1(26.391,23.368)
  Bottom Layer w0.254: v1(26.391,23.368) U4.14
Third_0: *3.16 *7.2 | length 24.5
  Top Layer w0.254: *3.16 v1(84.116,20.193)
  Bottom Layer w0.254: v1(84.116,20.193) 90.703,20.193 94.717,24.206 98.591,24.206 *7.2
Third_1: *3.15 *7.11 | length 13.5
  Top Layer w0.254: *3.15 87.749,12.37 89.891,12.37 90.297,12.776 90.297,18.974 89.98,19.291 *7.11
Third_2: *3.8 *7.10 | length 40.2
  Top Layer w0.254: *7.10 84.979,22.093 84.141,22.093 82.977,20.93 82.977,12.451 83.312,12.116 84.811,12.116 85.293,11.633 85.293,9.881 88.113,7.061 88.113,5.309 88.671,4.75 100.804,4.75 *3.8
Third_3: *3.9 *7.9 | length 29.8
  Top Layer w0.254: *3.9 101.896,24.223 v1(102.692,25.019)
  Bottom Layer w0.254: *7.9 92.853,25.222 96.825,25.222 98.603,27 100.711,27 v1(102.692,25.019)
Third_4: *3.13 *7.8 | length 36.5
  Top Layer w0.254: *7.8 88.23,39.437 89.078,40.284 90.653,40.284 91.611,39.326 91.611,36.373 93.269,34.715 93.269,24.74 91.669,23.139 91.669,14.351 91.736,14.283 *3.13
Third_5: *3.14 *7.7 | length 27.7
  Top Layer w0.254: *3.14 88.341,14.317 88.341,22.555 92.761,26.975 92.761,32.022 89.98,34.803 *7.7
Third_6: *3.11 *7.6 | length 26.6
  Top Layer w0.254: *7.6 93.98,36.893 94.285,36.588 94.285,23.851 95.864,22.272 95.864,14.414 *3.11
Third_7: *3.10 *7.5 | length 28.1
  Top Layer w0.254: *7.5 100.457,37.845 101.371,36.931 101.371,15.477 *3.10
Third_8: *3.1 *7.4 | length 43.5
  Top Layer w0.254: v1(82.398,23.901) 81.893,23.397 81.893,8.065 *3.1
  Bottom Layer w0.254: v1(82.398,23.901) 84.633,26.137 84.633,30.683 85.934,31.984 97.369,31.984 *7.4
Third_9: *3.2 *7.3 | length 43.2
  Top Layer w0.254: v1(84.455,24.409) 82.401,22.356 82.401,8.785 84.252,6.934 85.564,6.934 *3.2
  Bottom Layer w0.254: v1(84.455,24.409) 85.877,25.832 85.877,29.901 87.452,31.476 98.099,31.476 *7.3
Third_A: *3.3 U4.15 | length 100.3
  Top Layer w0.254: v1(25.197,24.562) 29.337,28.702 v1(29.337,35.814) ; v1(60.909,19.71) 60.909,16.586 63.525,13.97 63.525,11.887 64.694,10.719 68.428,10.719 70.333,8.814 80.086,8.814 80.797,8.103 80.797,6.909 81.301,6.405 81.301,5.08 v1(80.488,4.267)
  Bottom Layer w0.254: v1(25.197,24.562) 25.273,24.638 U4.15 ; v1(29.337,35.814) 29.616,36.093 48.793,36.093 52.908,31.979 54.94,31.979 56.159,30.759 56.159,24.46 v1(60.909,19.71) ; v1(80.488,4.267) 87.622,4.267 *3.3
Third_B: *3.6 U4.1 | length 75.7
  Top Layer w0.254: v1(93.193,16.764) 95.356,14.601 95.356,7.302 *3.6
  Bottom Layer w0.254: U4.1 36.678,25.908 46.634,15.951 92.38,15.951 v1(93.193,16.764)
Third_C: *3.7 U4.2 | length 78.4
  Top Layer w0.254: v1(97.917,15.977) 97.917,7.281 *3.7
  Bottom Layer w0.254: U4.2 36.627,24.638 45.91,15.354 97.295,15.354 v1(97.917,15.977)
Third_D: *3.4 U4.3 | length 75.6
  Top Layer w0.254: v1(85.395,17.551) 85.395,12.929 85.801,12.522 85.801,11.777 *3.4
  Bottom Layer w0.254: U4.3 33.299,23.368 32.893,23.774 32.893,26.387 33.096,26.59 36.732,26.59 46.634,16.688 84.531,16.688 v1(85.395,17.551)
pads on no net: *5.12 *6.12 *7.12 *8.12 ?.1 LED4.2 SW1.3 U3.9 U4.9 U6.2 U6.3 U6.7 U6.8 U6.9 U6.11 U6.12 U6.15 U6.30

## Keep-outs
Keep-Out Layer:
  the board outline again, w0.254

## Silkscreen, mask and mechanical layers (free items; w line width, h text height)
Top Overlay:
  lines w0.254: 44.499,45.509 44.499,48.43
  text "Ver 1.1" at 45.134,47.541 h1.4
  text "Designed by" at 49.833,47.541 h1.27
  text "YuwenTianhao" at 45.261,45.509 h2.29
Mechanical 1:
  the board outline again, w0.254